# Altium PCB Copy of pwr_V1.1.PcbDoc (part 1 of 2)
Units mil, origin at the board's own origin, x right, y up, seen from the top; angles counter-clockwise.
Board outline 5925.54 x 5925.54 mil, 4 copper layers (Top Layer, GND, VCC, Bottom Layer); 133 components, 126 nets, 409 pads, 2275 vias.
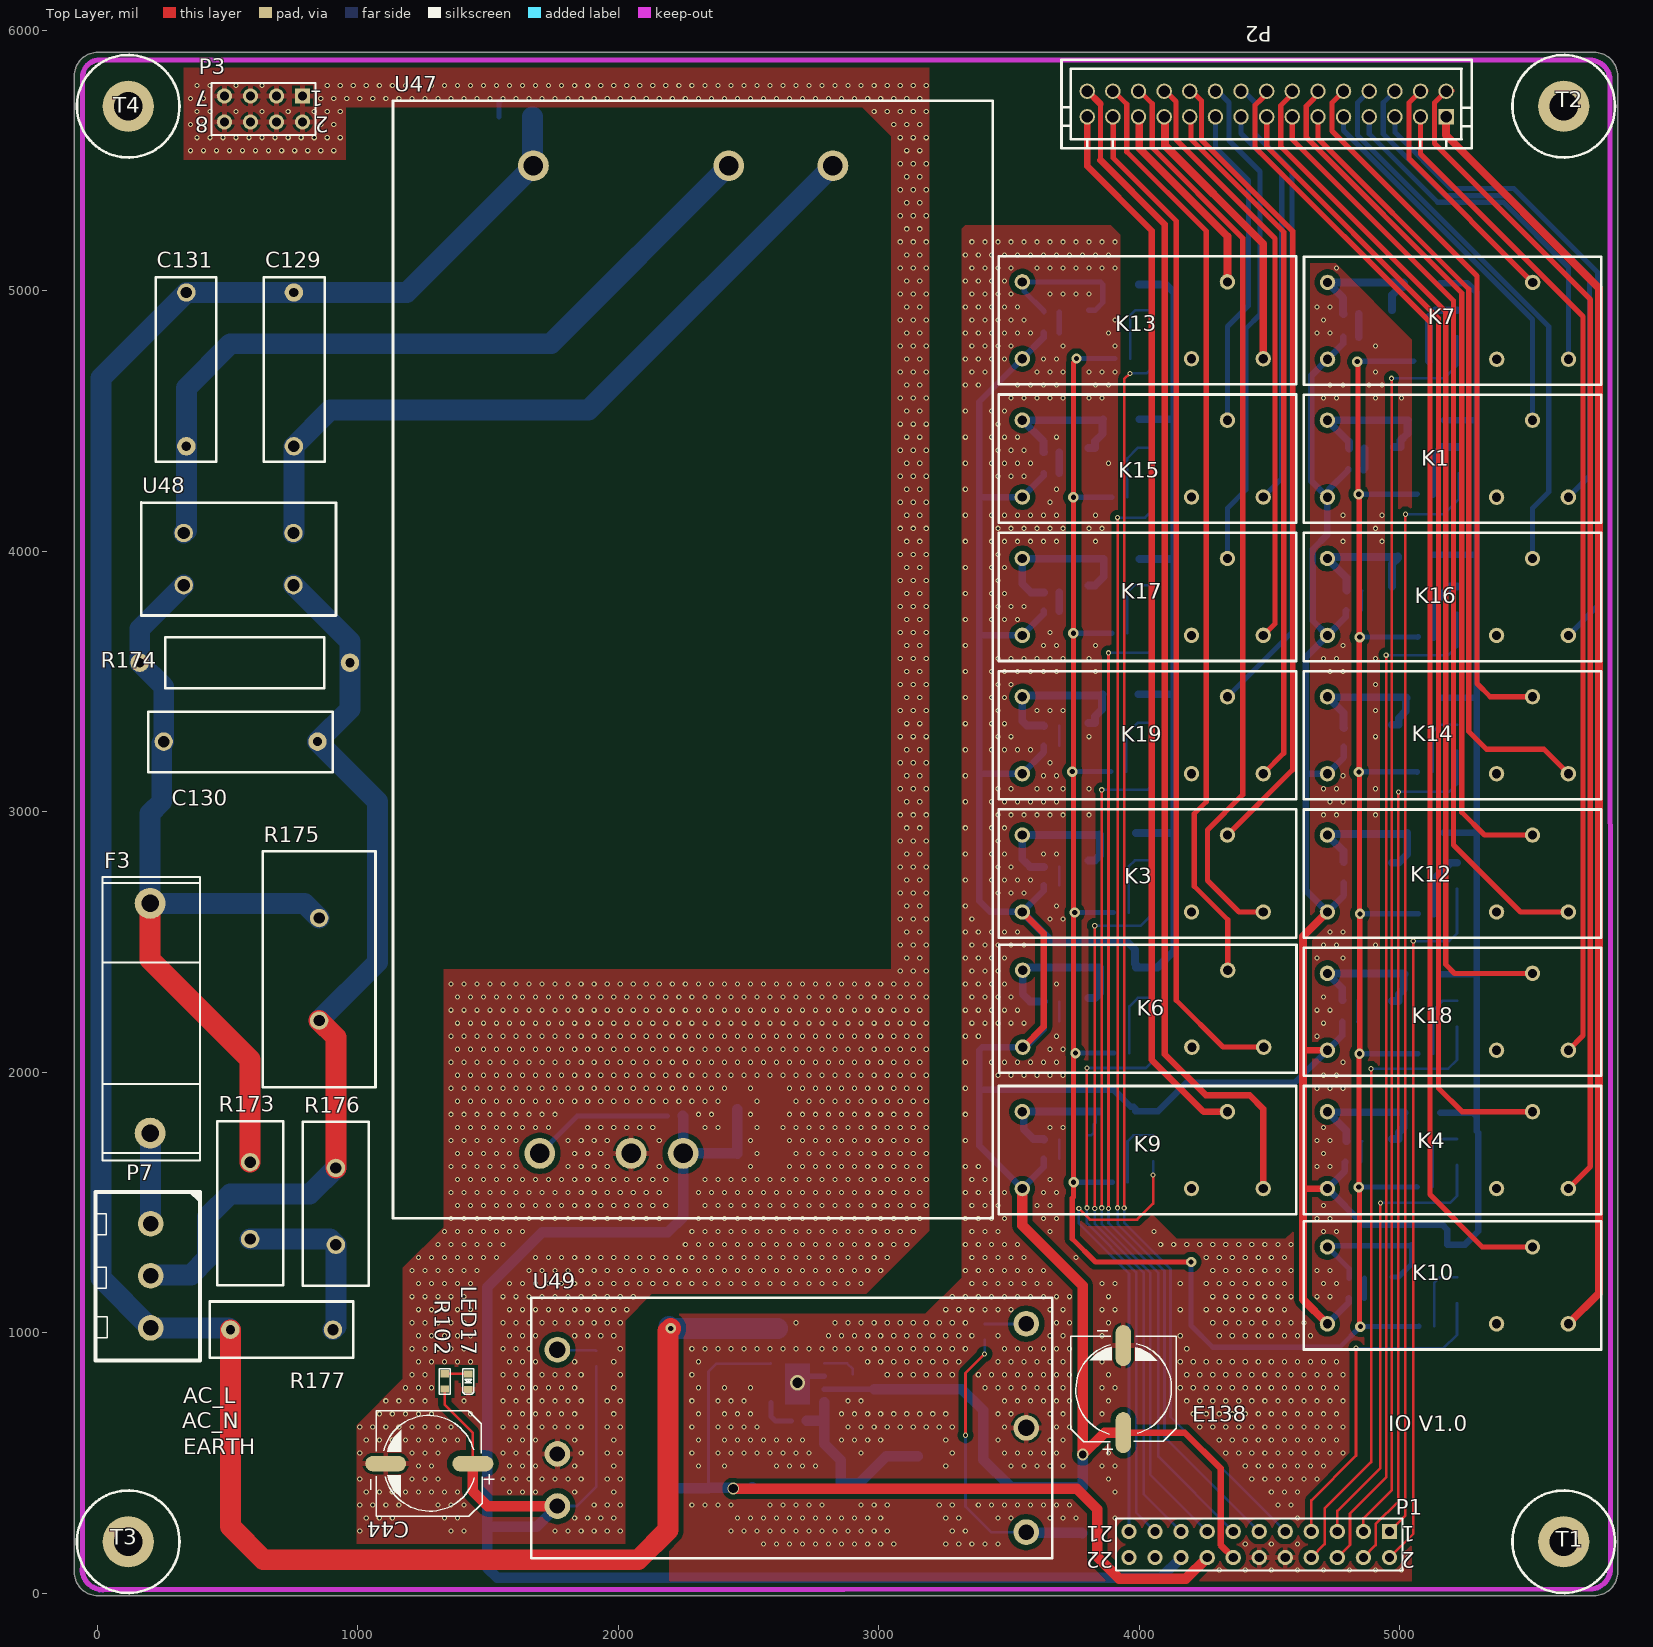
[diagram p0: Top Layer view]
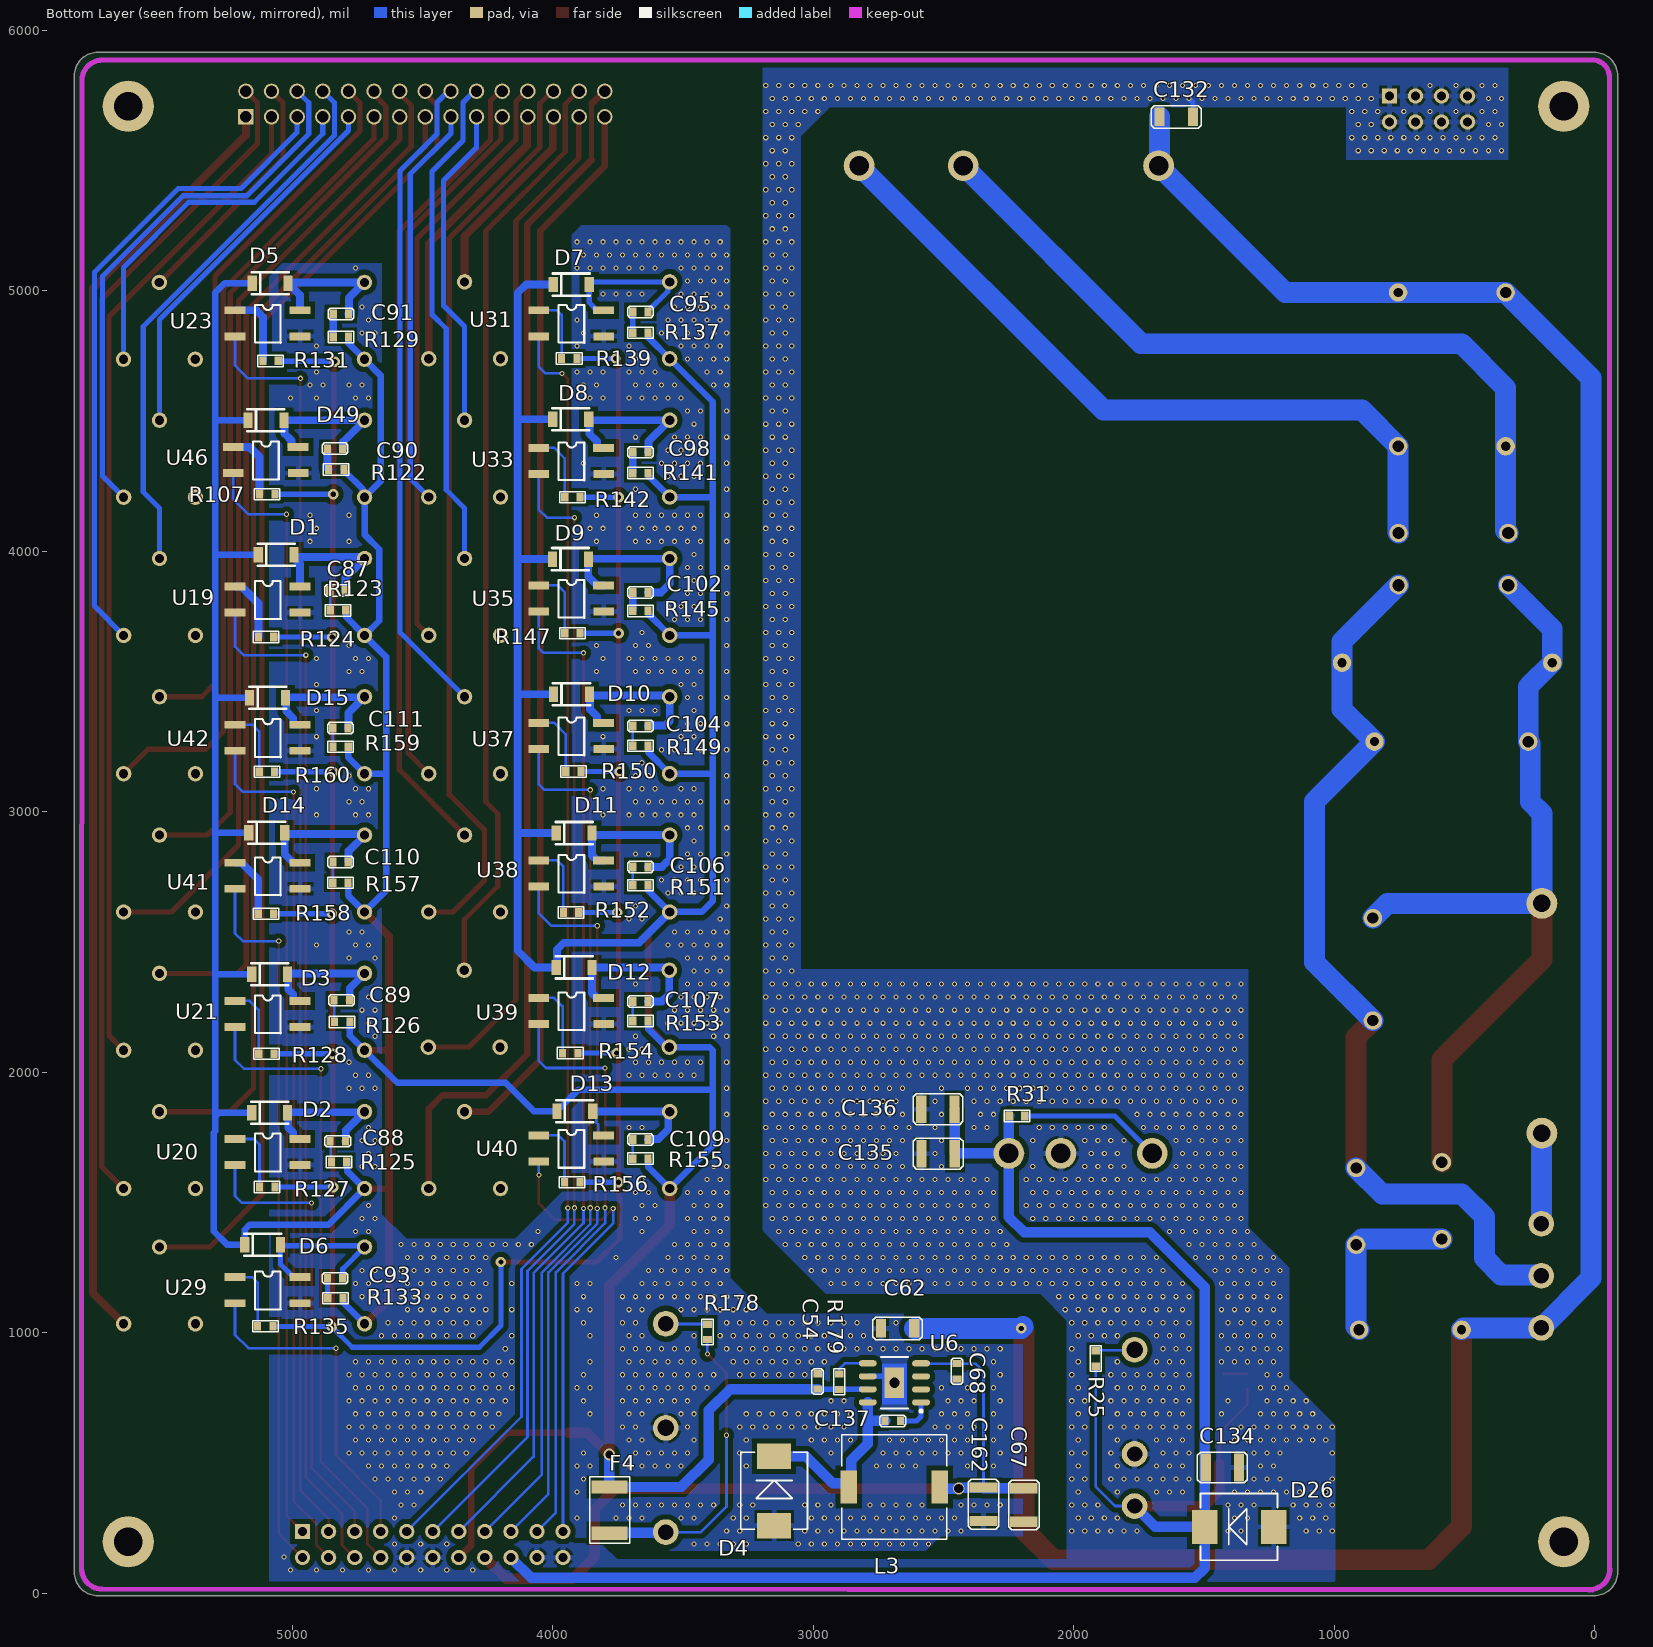
[diagram p1: Bottom Layer view, seen from below]

## Layer stack, top to bottom
Top Solder: solder mask 0.4, Solder Resist, Dk 3.5
Top Layer: signal copper 1.4
Dielectric1: core 12.6, FR-4, Dk 4.8
GND: signal copper 1.4
Dielectric2: prepreg 12.6, FR-4, Dk 4.8
VCC: signal copper 1.4
Dielectric3: core 12.6, FR-4, Dk 4.8
Bottom Layer: signal copper 1.4
Bottom Solder: solder mask 0.4, Solder Resist, Dk 3.5

## Board outline
0,-10.01 cw(c0,78.74) -88.76,78.74 -88.75,5826.67 -88.76,5826.77 cw(c0,5826.77) 0,5915.53 5748.03,5915.53 cw(c5748.03,5826.77) 5836.79,5826.77 5836.79,78.74 cw(c5748.03,78.74) 5748.03,-10.01

## Design rules (kind name [scope] priority, off if disabled: settings)
Clearance [InPolygon] p1: gap=20 ignorepadtopadclearanceinfootprint=FALSE
Clearance Clearance_1 [All] p2: gap=5 ignorepadtopadclearanceinfootprint=FALSE
HoleToHoleClearance [All] p1: gap=5 allowstackedmicrovias=TRUE
MinimumSolderMaskSliver [All] p1: minsoldermaskwidth=5
PolygonConnect PolygonConnect_1 [IsVia] p1: connectstyle=Direct reliefconductorwidth=10 reliefentries=4 polygonreliefangle="90 Angle" airgapwidth=10
PolygonConnect [All] p2: connectstyle=Relief reliefconductorwidth=20 reliefentries=4 polygonreliefangle="90 Angle" airgapwidth=10
RoutingVias [All] p1: holewidth=10 width=20 viastyle="Through Hole" minholewidth=10 minwidth=20 maxholewidth=100 maxwidth=200
SilkToSilkClearance [All] p1: silktosilkclearance=5
SilkToSolderMaskClearance SilkscreenOverComponentPads [IsPad] p1: minsilkscreentomaskgap=0 clearancetoexposedcopper=TRUE
SolderMaskExpansion [All] p1: expansion=4 istentingtop=FALSE
Width [All] p1: maxlimit=200 minlimit=10 preferedwidth=10
26 further rules are at their usual default settings.

## Classes and differential pairs
net class N000-1_[0..19]: N000-1_0 N000-1_1 N000-1_2 N000-1_3 N000-1_4 N000-1_5 N000-1_6 N000-1_7 N000-1_8 N000-1_9 N000-1_10 N000-1_11 N000-1_12 N000-1_13 N000-1_14 N000-1_15 N000-1_16 N000-1_17 N000-1_18 N000-1_19
net class DO_O[0..19]: DO_O0 DO_O1 DO_O2 DO_O3 DO_O4 DO_O5 DO_O6 DO_O7 DO_O8 DO_O9 DO_O10 DO_O11 DO_O12 DO_O13 DO_O14 DO_O15 DO_O16 DO_O17 DO_O18 DO_O19
net class DO[0..19]: DO0 DO1 DO2 DO3 DO4 DO5 DO6 DO7 DO8 DO9 DO10 DO11 DO12 DO13 DO14 DO15 DO16 DO17 DO18 DO19
net class DI[0..11]: DI0 DI1 DI2 DI3 DI4 DI5 DI6 DI7 DI8 DI9 DI10 DI11
component class relay: K1 K3 K4 K6 K7 K9 K10 K12 K13 K14 K15 K16 K17 K18 K19 P2
component class power: C44 C54 C62 C67 C68 C129 C130 C131 C132 C134 C135 C136 C137 C162 D4 D26 E138 F3 F4 L3 LED17 P7 R25 R31 R102 R173 R174 R175 R176 R177 R178 R179 T1 T2 T3 T4 U6 U47 U48 U49
component class do: C87 C88 C89 C90 C91 C93 C95 C98 C102 C104 C106 C107 C109 C110 C111 D1 D2 D3 D5 D6 D7 D8 D9 D10 D11 D12 D13 D14 D15 D49 F1 P1 P3 R107 R122 R123 R124 R125 R126 R127 R128 R129 R131 R133 R135 R137 R139 R141 R142 R145 R147 R149 R150 R151 R152 R153 R154 R155 R156 R157 R158 R159 R160 U19 U20 U21 U23 U29 U31 U33 U35 U37 U38 U39 U40 U41 U42 U46

## Components (designator, comment, footprint, x,y, rotation, side; value= is the part's Value field where it differs from the comment)
C44 "220uF/50V" Φ10×10 1274,497 r270 top
C54 "1uF" 0603C 2983,842 r270 bottom
C62 "1nF/2kV" 1206C 2739.95,1016 r180 bottom
C67 "22uF/10V" 1210C 2191,401.95 r270 bottom
C68 "0.1uF" 0603C 2448,881.06 r270 bottom
C87 "0.1uF" 0603C 4796.94,3849 r0 bottom
C88 "0.1uF" 0603C 4796,1735 r0 bottom
C89 "0.1uF" 0603C 4780.94,2276 r0 bottom
C90 "0.1uF" 0603C 4806,4394 r0 bottom
C91 "0.1uF" 0603C 4783.94,4911 r0 bottom
C93 "0.1uF" 0603C 4805.94,1208.82 r0 bottom
C95 "0.1uF" 0603C 3633.94,4919 r0 bottom
C98 "0.1uF" 0603C 3633.94,4380 r0 bottom
C102 "0.1uF" 0603C 3633.94,3842 r0 bottom
C104 "0.1uF" 0603C 3633.94,3329 r0 bottom
C106 "0.1uF" 0603C 3633.94,2788 r0 bottom
C107 "0.1uF" 0603C 3633.94,2271 r0 bottom
C109 "0.1uF" 0603C 3633.94,1741 r0 bottom
C110 "0.1uF" 0603C 4784.94,2807 r0 bottom
C111 "0.1uF" 0603C 4785.94,3321 r0 bottom
C129 "2.2nF/400VAC" 15x18 754,4993.55 r270 top value=22nF
C130 "0.15μF/300VAC" 15x18 844.81,3269 r180 top value=22nF
C131 "2.2nF/400VAC" 15x18 341.26,4403 r90 top value=22nF
C132 "1nF/2KV" 1206C 1542.05,5668 r0 bottom value=22nF
C134 "1uF/50V" 1210C 1365,482 r0 bottom value=22nF
C135 "4.7uF/50V" 1210C 2583.95,1687 r180 bottom value=22nF
C136 "10uF/50V" 1210C 2585,1858 r180 bottom value=22nF
C137 "0.01uF" 0603C 2724,661 r180 bottom
C162 "22uF/10V" 1210C 2346,404.95 r270 bottom
D1 "LL4148" DO-213AB/LL34/MiniMELF 5062.1,3986 r180 bottom
D2 "LL4148" DO-213AB/LL34/MiniMELF 5087.1,1844 r180 bottom
D3 "LL4148" DO-213AB/LL34/MiniMELF 5087,2376 r180 bottom
D4 "SS54" SMC 3150,259 r90 bottom
D5 "LL4148" DO-213AB/LL34/MiniMELF 5085,5029 r180 bottom
D6 "LL4148" DO-213AB/LL34/MiniMELF 5114,1337.82 r180 bottom
D7 "LL4148" DO-213AB/LL34/MiniMELF 3929,5024 r180 bottom
D8 "LL4148" DO-213AB/LL34/MiniMELF 3931,4507 r180 bottom
D9 "LL4148" DO-213AB/LL34/MiniMELF 3932,3970 r180 bottom
D10 "LL4148" DO-213AB/LL34/MiniMELF 3928,3451 r180 bottom
D11 "LL4148" DO-213AB/LL34/MiniMELF 3918,2918 r180 bottom
D12 "LL4148" DO-213AB/LL34/MiniMELF 3918,2402 r180 bottom
D13 "LL4148" DO-213AB/LL34/MiniMELF 3915,1850 r180 bottom
D14 "LL4148" DO-213AB/LL34/MiniMELF 5098,2919 r180 bottom
D15 "LL4148" DO-213AB/LL34/MiniMELF 5095,3437 r180 bottom
D26 "SMCJ30CA" SMC 1231.25,254 r0 bottom
D49 "LL4148" DO-213AB/LL34/MiniMELF 5101,4503 r180 bottom
E138 "100uF/50V" Φ10×10 3939,783 r180 top value=100pF
F3 "6.3A/250V" 可视开关电源保险丝座 202,1766 r90 top
F4 "2A" 1812-F 3782,230 r90 bottom
K1 "G2RL-1-H" G2RL-1-H 4722.39,4503.05 r0 top
K3 "G2RL-1-H" G2RL-1-H 3551,2910.28 r0 top
K4 "G2RL-1-H" G2RL-1-H 4722.39,1848.28 r0 top
K6 "G2RL-1-H" G2RL-1-H 3552.39,2391.28 r0 top
K7 "G2RL-1-H" G2RL-1-H 4723,5032.28 r0 top
K9 "G2RL-1-H" G2RL-1-H 3551,1848.28 r0 top
K10 "G2RL-1-H" G2RL-1-H 4722.39,1328.82 r0 top
K12 "G2RL-1-H" G2RL-1-H 4722.39,2910.18 r0 top
K13 "G2RL-1-H" G2RL-1-H 3551,5034.28 r0 top
K14 "G2RL-1-H" G2RL-1-H 4722.39,3441.14 r0 top
K15 "G2RL-1-H" G2RL-1-H 3551,4503.28 r0 top
K16 "G2RL-1-H" G2RL-1-H 4722.39,3972.09 r0 top
K17 "G2RL-1-H" G2RL-1-H 3551,3972.28 r0 top
K18 "G2RL-1-H" G2RL-1-H 4722.39,2379.23 r0 top
K19 "G2RL-1-H" G2RL-1-H 3551,3441.28 r0 top
L3 "CDRH105NP-100NC" CDRH105 2889.59,206.21 r90 bottom
LED17 "5V" 0603LED 1424,841.06 r270 top
P1 "XHD2.54mm 2*15" HDR2X11 4960.63,236.22 r180 top locked
P2 "Header 15X2" CONN-TH_30P-P2.50_KH-A2557-2X15A 4489.23,5717.21 r0 top
P3 "Header 4X2" HDR2X4 787.4,5748.03 r180 top locked
P7 "Header 3" KF128V-3P 204.26,1418 r270 top
R25 "NC" 0603R 1915,871 r90 bottom value=100K
R31 "NC" 0603r 2188,1832 r0 bottom value=100K
R102 "5.1K" 0603R 1333,842.06 r270 top
R107 "510" 0603R 5126,4219 r180 bottom
R122 "51K" 0603R 4861.06,4314 r180 bottom
R123 "51K" 0603R 4854,3773 r180 bottom
R124 "510" 0603R 5130,3671 r180 bottom
R125 "51K" 0603R 4850,1655 r180 bottom
R126 "51K" 0603R 4838,2193 r180 bottom
R127 "510" 0603R 5126.06,1559 r180 bottom
R128 "510" 0603R 5129.06,2071 r180 bottom
R129 "51K" 0603R 4843.06,4823 r180 bottom
R131 "510" 0603R 5113,4731 r180 bottom
R133 "51K" 0603R 4864.06,1131.82 r180 bottom
R135 "510" 0603R 5133.06,1024 r180 bottom
R137 "51K" 0603R 3693,4839 r180 bottom
R139 "510" 0603R 3966.06,4740 r180 bottom
R141 "51K" 0603R 3693,4300 r180 bottom
R142 "510" 0603R 3954.06,4207 r180 bottom
R145 "51K" 0603R 3693,3771 r180 bottom
R147 "510" 0603R 3954,3685 r180 bottom
R149 "51K" 0603R 3693,3253 r180 bottom
R150 "510" 0603R 3950.06,3154 r180 bottom
R151 "51K" 0603R 3693,2718 r180 bottom
R152 "510" 0603R 3959,2613 r180 bottom
R153 "51K" 0603R 3693,2196 r180 bottom
R154 "510" 0603R 3962.06,2073 r180 bottom
R155 "51K" 0603R 3693,1668 r180 bottom
R156 "510" 0603R 3955,1577 r180 bottom
R157 "51K" 0603R 4845,2727 r180 bottom
R158 "510" 0603R 5131,2608 r180 bottom
R159 "51K" 0603R 4844,3249 r180 bottom
R160 "510" 0603R 5127,3153 r180 bottom
R173 "14D561K" 14D561K 586.26,1359 r90 top
R174 "1MΩ/2W" 5x15.5 162.26,3572 r0 top value=100K
R175 "20D471K" 20D471K 851,2198 r90 top
R176 "14D561K" 14D561K 915.26,1632.28 r270 top
R177 "B5G3600" B5G3600 510.26,1011 r0 top
R178 "NC" 0603r 3406,1032.06 r270 bottom value=100K
R179 "100K" 0603R 2900,841 r270 bottom
T1 "TP" M2.5 5629.92,196.85 r0 top
T2 "TP" M2.5 5629.92,5708.66 r0 top
T3 "TP" M2.5 118.11,196.85 r0 top
T4 "TP" M2.5 118.11,5708.66 r0 top
U6 "LM22676MRE-5.0/NOPB" SOP127P600X168_HS-8N 2688,807 r0 bottom
U19 "AQY210S" sop4 5220,3864.43 r180 bottom
U20 "AQY210S" sop4 5220,1743.29 r180 bottom
U21 "AQY210S" sop4 5220,2273.57 r180 bottom
U23 "AQY210S" sop4 5220,4925 r180 bottom
U29 "AQY210S" sop4 5220,1213 r180 bottom
U31 "AQY210S" sop4 4054,4925 r180 bottom
U33 "AQY210S" sop4 4054,4397 r180 bottom
U35 "AQY210S" sop4 4054,3869 r180 bottom
U37 "AQY210S" sop4 4054,3341 r180 bottom
U38 "AQY210S" sop4 4054,2813 r180 bottom
U39 "AQY210S" sop4 4054,2285 r180 bottom
U40 "AQY210S" sop4 4054,1757 r180 bottom
U41 "AQY210S" sop4 5220,2803.86 r180 bottom
U42 "AQY210S" sop4 5220,3334.14 r180 bottom
U46 "AQY210S" sop4 5227,4400 r180 bottom
U47 "LHE60-20B24" LHE60-20B24 2823.85,5480.13 r270 top
U48 "FL2D-30-222" TY-100P 752.52,3870 r180 top
U49 "URB24_LD-50WR3G" URB24_LD-50WR3G 1666,634 r0 top

## Footprints (in the part's own frame and the unit in brackets; to place one, negate y for a bottom-side part, rotate by r counter-clockwise, add the part's x,y. Pads: shape width x height; smd on the part's side, far side on the other; paste and mask are expansions set on the pad)
5x15.5 [mm]
  round 1.8 hole 0.9: 1(0,0) 2(20.5,0)
  silkscreen extent 2.5,-2.5 18,2.5
14D561K [mm]
  round 1.8 hole 1.1: 1(0,0) 2(7.5,0)
  silkscreen extent -4.5,-3.21 11.5,3.21
15x18 [mm]
  round 1.8 hole 0.9: 1(0,0)
  round 1.8 hole 1.1: 2(15,0)
  silkscreen extent -1.5,-2.92 16.5,3
20D471K [mm]
  round 1.8 hole 1.1: 1(0,0) 2(10,0)
  silkscreen extent -6.5,-5.5 16.5,5.5
0603C [mm]
  rect 0.7x0.85 smd: 1(0,0) 2(1.5,0)
  silkscreen extent -0.5,-0.55 2,0.55
0603LED [mm]
  rect 0.7x0.85 smd: 1(0,0) 2(1.5,0)
  silkscreen extent -0.5,-0.55 2,0.55
0603R [mm]
  rect 0.7x0.85 smd: 1(0,0) 2(1.5,0)
  silkscreen extent -0.5,-0.55 2,0.55
0603r [mm]
  rect 0.7x0.85 smd: 1(0,0) 2(1.5,0)
  silkscreen extent -0.5,-0.55 2,0.55
1206C [mm]
  rect 1x1.8 smd: 1(0,0) 2(3.25,0)
  silkscreen extent -0.8,-1.1 4.05,1.1
1210C [mm]
  rect 1x2.7 smd: 1(0,0) 2(3.25,0)
  silkscreen extent -0.8,-1.5 4.05,1.5
1812-F [mm]
  rect 1.3x3.5 smd: 1(0,0) 2(4.5,0)
  silkscreen extent -1,-1.95 5.5,1.95
B5G3600 [mm]
  round 1.8 hole 0.9: 1(0,0)
  round 1.8 hole 1.1: 2(10,0)
  silkscreen extent -2,-2.75 12,2.75
CDRH105 [mm]
  rect 3.2x1.6 smd: 1(5.1,-0.65) 2(5.1,-9.55)
  silkscreen extent 0,-10.2 10.2,0
CONN-TH_30P-P2.50_KH-A2557-2X15A [mm]
  rect 1.5x1.5 hole 1.1 paste-2539.97 mask+0.05: 1(17.5,-1.25)
  round 1.5 hole 1.1 paste-2539.97 mask+0.05: 2(17.5,1.25) 3(15,-1.25) 4(15,1.25) 5(12.5,-1.25) 6(12.5,1.25) 7(10,-1.25) 8(10,1.25) 9(7.5,-1.25) 10(7.5,1.25) 11(5,-1.25) 12(5,1.25) 13(2.5,-1.25) 14(2.5,1.25) 15(0,-1.25) 16(0,1.25) 17(-2.5,-1.25) 18(-2.5,1.25) 19(-5,-1.25) 20(-5,1.25) 21(-7.5,-1.25) 22(-7.5,1.25) 23(-10,-1.25) 24(-10,1.25) 25(-12.5,-1.25) 26(-12.5,1.25) 27(-15,-1.25) 28(-15,1.25) 29(-17.5,-1.25) 30(-17.5,1.25)
  silkscreen extent -20.01,-4.3 20.01,4.3
DO-213AB/LL34/MiniMELF [mm]
  rect 0.9x1.5 smd: 1(1.75,0) 2(-1.75,0)
  silkscreen extent -1.8,-1.08 1.8,1.08
G2RL-1-H [mm]
  round 1.5 hole 0.9: 1(20,0) 2(16.5,-7.5) 3(23.5,-7.5) 4(0,-7.5) 5(0,0)
  silkscreen extent -2.3,-10 26.7,2.5
HDR2X4 [mm] "Connector; Header; 4x2 Position"
  rect 1.5x1.5 hole 0.9: 1(0,0)
  round 1.5 hole 0.9: 2(0,2.54) 3(2.54,0) 4(2.54,2.54) 5(5.08,0) 6(5.08,2.54) 7(7.62,0) 8(7.62,2.54)
  silkscreen extent -1.27,-1.27 8.89,3.81
HDR2X11 [mm] "Connector; Header; 11x2 Position"
  rect 1.5x1.5 hole 0.9: 1(0,0)
  round 1.5 hole 0.9: 2(0,2.54) 3(2.54,0) 4(2.54,2.54) 5(5.08,0) 6(5.08,2.54) 7(7.62,0) 8(7.62,2.54) 9(10.16,0) 10(10.16,2.54) 11(12.7,0) 12(12.7,2.54) 13(15.24,0) 14(15.24,2.54) 15(17.78,0) 16(17.78,2.54) 17(20.32,0) 18(20.32,2.54) 19(22.86,0) 20(22.86,2.54) 21(25.4,0) 22(25.4,2.54)
  silkscreen extent -1.27,-1.27 26.67,3.81
KF128V-3P [mm]
  round 2.5 hole 1.5: 1(0,0) 2(5.08,0) 3(10.16,0)
  silkscreen extent -3.1,-5.4 13.33,4.8
LHE60-20B24 [mm]
  round 3 hole 1.9: 1(0,0) 2(0,-10.16) 3(0,-29.21) 4(96.32,-28.59) 5(96.32,-19.69) 6(96.32,-14.61)
  silkscreen extent -6.34,-42.9 102.66,15.6
M2.5 [mm]
  round 5 hole 2.8 unplated: 1(0,0)
  silkscreen extent -5,-5 5,5
SMC [mm]
  rect 2.5x3.3 smd: 1(0,0) 2(6.75,0)
  silkscreen extent -0.35,-3.25 7.15,3.25
sop4 [mil]
  rect 80x30 smd: 1(0,0) 2(0,-100) 3(250,-100) 4(249,0)
  silkscreen extent 76,-125 176,21
SOP127P600X168_HS-8N [mm] "SOP, 8-Leads, Body 5.0x4.0mm (max), Pitch 1.27mm, IPC Medium Density"
  oval 1.75x0.6 smd: 1(-2.6,1.905) 2(-2.6,0.635) 3(-2.6,-0.635) 4(-2.6,-1.905) 5(2.6,-1.905) 6(2.6,-0.635) 7(2.6,0.635) 8(2.6,1.905)
  rect 1.9x3 smd: 9(0,0)
  silkscreen extent -2.72,-2.5 1.33,2.88, body extent -2,-2.5 2,2.5, height 1.68
TY-100P [mm]
  round 1.8 hole 1.2: 1(0,0) 2(10.7,0) 3(10.7,-5.08) 4(0,-5.08)
  silkscreen extent -4.15,-8.08 14.86,2.96
URB24_LD-50WR3G [mm]
  round 2.5 hole 1.6: 1(2.54,7.62) 5(48.26,0)
  round 2.5 hole 1.5: 2(2.54,-2.54) 3(2.54,-7.62) 4(48.26,-10.16) 6(48.26,10.16)
  silkscreen extent 0,-12.7 50.8,12.7
Φ10×10 [mm]
  oval 1.524x4 smd: 1(0,4.25) 2(0,-4.25)
  silkscreen extent -5.15,-5.71 5.15,6.35
可视开关电源保险丝座 [mm]
  round 3 hole 1.7: 1(0,0) 2(22.4,0)
  silkscreen extent -2.69,-4.86 24.98,4.64

## Part data
C44 E138: library part "Cap Pol1", "Polarized Capacitor (Radial)", LatestRevisionDate=17-Jul-2002, LatestRevisionNote="Re-released for DXP Platform.", PackageReference=RB7.6-15, Published=8-Jun-2000, Publisher="Altium Limited"
C54 C62 C67 C68 C87 C88 C89 C90 C91 C93 C95 C98 C102 C104 C106 C107 C109 C110 C111 C137 C162: library part CAP, "Capacitor"
C129 C130 C131 C132 C134 C135 C136: library part Cap, "Capacitor", LatestRevisionDate=17-Jul-2002, LatestRevisionNote="Re-released for DXP Platform.", PackageDescription="Radial Cap, Thru-Hole; 2 Leads; 0.3 in Pin Spacing", PackageReference=RAD-0.3, Published=8-Jun-2000, Publisher="Altium Limited"
D1 D2 D3 D5 D6 D7 D8 D9 D10 D11 D12 D13 D14 D15 D49: "VISHAY,LL4148,圆柱体MiniMELF100V/2A,ROHS", 制造商=VISHAY, 名称=快速开关二极管, 版本=V1.00, 物料编号=APLLY
D4 D26: library part "DIODE S", "Schottky Diode"
F3 F4: library part "Fuse 1", "Fuse", LatestRevisionDate=17-Jul-2002, LatestRevisionNote="Re-released for DXP Platform.", PackageDescription="Thru-Hole; 2 Leads", PackageReference=PIN-W2/E2.8, Published=8-Jun-2000, Publisher="Altium Limited"
K1 K3 K4 K6 K7 K9 K10 K12 K13 K14 K15 K16 K17 K18 K19: library part Relay-SPDT, "Single-Pole Dual-Throw Relay", LatestRevisionDate=17-Jul-2002, LatestRevisionNote="Re-released for DXP Platform.", PackageReference=MODULE5B, Published=24-Mar-1999, Publisher="Altium Limited"
L3: library part INDUCTOR
LED17: library part LED
P1: library part "Header 11X2", "Header, 11-Pin, Dual row", LatestRevisionDate=17-Jul-2002, LatestRevisionNote="Re-released for DXP Platform.", Publisher="Altium Limited"
P2: "Header, 15-Pin, Dual row", LatestRevisionDate=17-Jul-2002, LatestRevisionNote="Re-released for DXP Platform.", Publisher="Altium Limited"
P3: "Header, 4-Pin, Dual row", LatestRevisionDate=17-Jul-2002, LatestRevisionNote="Re-released for DXP Platform.", Publisher="Altium Limited"
P7: "Header, 3-Pin", LatestRevisionDate=17-Jul-2002, LatestRevisionNote="Re-released for DXP Platform.", Publisher="Altium Limited"
R25 R31 R174 R178: library part RES0603, ID=233, 制造商=三星/YAGEO, 参数值=1.00E+04, 器件等级=——, 工作温度="–55°C to 155°C", 序号=109, 物料主编码(PN)=150000040, 物料名称=贴片电阻, 物料描述=RES,贴片电阻,0603,10k,±1%,1/10W,1.6X0.8X0.45mm,RC1608F103CS/RC0603FR-0710KL, 物料类型=表贴电阻, 精度=±1%, 规格型号(完整型号)=RC1608F103CS/RC0603FR-0710KL
R102: library part R, "R"
R107 R124 R127 R128 R131 R135 R139 R142 R147 R150 R152 R154 R156 R158 R160: library part RES2
R122 R123 R125 R126 R129 R133 R137 R141 R145 R149 R151 R153 R155 R157 R159: library part Res0805M
R173 R175 R176 R177: library part "Res Varistor", "Varistor (Voltage-Sensitive Resistor)", Code_IPC=RESC2012, LatestRevisionDate=29-May-2009, LatestRevisionNote="IPC-7351 Footprint Added.", PackageDescription="Chip Resistor 0805 Case Size", PackageReference=6-0805, PackageVersion=Mar-2003, Published=24-Mar-1999, Publisher="Altium Limited"
R179: library part Res1, "Resistor", LatestRevisionDate=17-Jul-2002, LatestRevisionNote="Re-released for DXP Platform.", PackageReference=AXIAL-0.3, Published=8-Jun-2000, Publisher="Altium Limited"
U6: library part LM22676MR-5.0
U19 U20 U21 U23 U29 U31 U33 U35 U37 U38 U39 U40 U41 U42 U46: library part Optoisolator1, "4-Pin Phototransistor Optocoupler", DatasheetVersion=Nov-2003, LatestRevisionDate=04-Mar-2005, LatestRevisionNote="Sch pins 3 & 4 Swapped.", PackageReference=DIP-4, Published=24-Mar-1999, Publisher="Altium Limited"
U48: library part TY-100P, "PCB mounting filters"

## Via types
v1: diameter 20, hole 12, Top Layer to Bottom Layer, tented both sides, 2255 vias
v2: diameter 40, hole 20, Top Layer to Bottom Layer, tented both sides, 17 vias
v3: diameter 45, hole 35, Top Layer to Bottom Layer, tented both sides, 1 vias
v4: diameter 45, hole 30, Top Layer to Bottom Layer, tented both sides, 1 vias
v5: diameter 59.06, hole 39.37, Top Layer to Bottom Layer, 1 vias

## Nets (pads, with @x,y where several pads share a name; then routed paths per layer and width w, separated by ;. In a path a pad name is that pad's centre, name@x,y a point inside that pad or via, vN(x,y) a via of type N, cw(c..) or ccw(c..) an arc to the next point about the centre after c; other vN are vias at no path point)
3.3V_ISO: R107.2 R124.2 R127.2 R128.2 R131.2 R135.2 R139.2 R142.2 R147.2 R150.2 R152.2 R154.2 R156.2 R158.2 R160.2 | length 11400.2
  Top Layer w20: v2(3759.06,4740) 3759.06,4734.59 3748,4723.53 v2(3748,1577) 3748,1521.12 3743,1516.12 3743,1360 3832,1271 v2(4199,1271) ; v2(4837,4728) 4839.72,4725.28 4839.72,4221.22 v2(4842.44,4218.5) 4844.44,4216.5 4844.44,3672.5 v2(4846.44,3670.5) 4844.94,3669 4844.94,3154 v2(4843.44,3152.5) 4845.44,3150.5 4845.44,2609.5 v2(4847.44,2607.5) 4846.47,2606.53 4846.47,2071.47 v2(4845.5,2070.5) 4844,2069 4844,1560 v2(4842.5,1558.5) 4845.75,1555.25 4845.75,1026.25 v2(4849,1023)
  Bottom Layer w20: v2(3743.06,3154) R150.2@3891,3154 ; v2(3747,3685) R147.2@3894.94,3685 ; v2(3747.06,4207) R142.2@3895,4207 ; v2(3748,1577) R156.2@3895.94,1577 ; v2(3752,2613) R152.2@3899.94,2613 ; v2(3755.06,2073) R154.2@3903,2073 ; v2(3759.06,4740) R139.2@3907,4740 ; v2(4199,1271) 4199,1027 4282,944 4770,944 v2(4849,1023) 4849.5,1023.5 5073.5,1023.5 R135.2@5074,1024 ; v2(4837,4728) 4838.5,4729.5 5052.44,4729.5 R131.2@5053.94,4731 ; v2(4842.44,4218.5) 4842.94,4219 R107.2@5066.94,4219 R107.2@5067.44,4219.5 ; v2(4842.5,1558.5) 4843,1559 R127.2@5067,1559 ; v2(4843.44,3152.5) 4843.94,3153 R160.2@5067.94,3153 ; v2(4845.5,2070.5) 4846,2071 R128.2@5070,2071 ; v2(4846.44,3670.5) 4846.94,3671 R124.2@5070.94,3671 ; v2(4847.44,2607.5) 4847.94,2608 R158.2@5071.94,2608 ; R127.2@5065,1561 R127.2@5067,1559 ; R160.2@5065.94,3151 R160.2@5067.94,3153 ; R127.2@5067.5,1559.5 R127.2@5067,1559 ; R160.2@5068.44,3153.5 R160.2@5067.94,3153 ; R124.2@5068.44,3668.5 R124.2@5070.94,3671 ; R128.2@5069.5,2071.5 R128.2@5070,2071 ; R128.2@5070.5,2071.5 R128.2@5070,2071 ; R158.2@5070.94,2607 R158.2@5071.94,2608 ; R124.2@5071.44,3671.5 R124.2@5070.94,3671 ; R158.2@5072.44,2608.5 R158.2@5071.94,2608
24V_F: C54.2 D1.2 D2.2 D3.2 D5.2 D6.2 D7.2 D8.2 D9.2 D10.2 D11.2 D12.2 D13.2 D14.2 D15.2 D49.2 E138.1 F4.2 K1.4 K3.4 K4.4 K6.4 K7.4 K9.4 K10.4 K12.4 K13.4 K14.4 K15.4 K16.4 K17.4 K18.4 K19.4 P1.14 R122.2 R123.2 R125.2 R126.2 R129.2 R133.2 R137.2 R141.2 R145.2 R149.2 R151.2 R153.2 R155.2 R157.2 R159.2 R179.2 U6.7 | length 24668.8
  Top Layer w25: K3.4@3551,2615 3632.67,2533.33 3632.67,2174.35 3554.32,2096 K6.4@3552.39,2096 ; E138.1@3939,615.68 4175,615.68 4312,478.68 4312,184.85 P1.14@4360.63,136.22 ; 4629,1555 4631,1553 K4.4@4722.39,1553 ; 4629,2080 4632.95,2083.95 K18.4@4722.39,2083.95
  Top Layer w30: K10.4@4722.39,1033.55 4629,1126.94 4629,1555 4629,2080 4629,2521.51 K12.4@4722.39,2614.91
  Top Layer w40: K9.4@3551,1553 3551,1412 3783,1180 v4(3783,532) 3866.68,615.68 E138.1@3939,615.68
  Bottom Layer w20: U6.7@2790.36,782 2790.83,782.47 2982.53,782.47 C54.2@2983,782.94
  Bottom Layer w25: K6.4@3552.39,2096 3398,2096 3386,2084 3386,1933 ; K6.4@3557.7,2090.7 3632.67,2165.67 3632.67,2194.72 R153.2@3633.94,2196 ; R155.2@3633.94,1668 3632.67,1666.72 3632.67,1634.67 K9.4@3551,1553 3386,1718 3386,1933 ; R151.2@3633.94,2718 3632.67,2716.72 3632.67,2696.67 K3.4@3551,2615 3428,2615 3386,2657 3386,3150 ; R149.2@3633.94,3253 3632.67,3251.72 3632.67,3227.67 K19.4@3551,3146 3390,3146 3386,3150 ; R145.2@3633.94,3771 3632.67,3769.72 3632.67,3758.67 K17.4@3551,3677 3388,3677 3386,3679 ; R141.2@3633.94,4300 3632.67,4298.72 3632.67,4289.67 K15.4@3551,4208 3393,4208 3386,4201 ; R137.2@3633.94,4839 3632.67,4837.72 3632.67,4820.67 K13.4@3551,4739 3386,4574 3386,4201 ; K10.4@4722.39,1033.55 4803.72,1114.87 4803.72,1130.54 R133.2@4805,1131.82 ; R126.2@4778.94,2193 4778.94,2140.51 K18.4@4722.39,2083.95 4597.44,1959 4181,1959 4072,1850 D13.2@3983.9,1850 3983.9,1861.81 3978.68,1867.03 3966.87,1867.03 3900.9,1933 3386,1933 ; R129.2@4784,4823 4782.72,4821.72 4782.72,4796.72 K7.4@4723,4737 4661,4675 4661,4269.16 K1.4@4722.39,4207.77 ; R159.2@4784.94,3249 4784.94,3208.41 K14.4@4722.39,3145.86 4640,3145.86 ; R157.2@4785.94,2727 4785.94,2678.46 K12.4@4722.39,2614.91 4640,2697.3 4640,3145.86 ; R125.2@4790.94,1655 4789.67,1653.72 4789.67,1620.27 K4.4@4722.39,1553 4861.39,1414 5164,1414 5182.9,1395.1 D6.2@5182.9,1337.82 5250.82,1337.82 5302,1389 5302,1767 5295.81,1773.19 5295.81,1829 ; R123.2@4794.94,3773 4793.67,3771.72 4793.67,3748.09 K16.4@4722.39,3676.82 ; R122.2@4802,4314 4802,4311.05 4728.91,4237.96 4728.91,4214.29 K1.4@4722.39,4207.77 ; D1.2@5131,3986 5289.81,3986 5295.81,3980 ; D5.2@5153.9,5029 5260,5029 5295.81,4993.19 5295.81,4508 ; D3.2@5155.9,2376 5292.58,2376 5295.81,2379.23 ; D2.2@5156,1844 5280.81,1844 5295.81,1829 ; D15.2@5163.9,3437 5289.81,3437 5295.81,3431 ; D14.2@5166.9,2919 5291.81,2919 5295.81,2915 ; D49.2@5169.9,4503 5290.81,4503 5295.81,4508 ; 3386,3150 3386,3679 ; 3386,3679 3386,4201 ; 4640,3145.86 4640,3594.42 K16.4@4722.39,3676.82 ; K16.4@4722.39,3676.82 4666,3733.21 4666,4007.58 4722.39,4063.97 K1.4@4722.39,4207.77 ; 5295.81,1829 5295.81,2379.23 ; 5295.81,2379.23 5295.81,2915 ; 5295.81,2915 5295.81,3431 ; 5295.81,3431 5295.81,3980 ; 5295.81,3980 5295.81,4508
  Bottom Layer w30: K3.4@3551,2615 3669,2497 3957.43,2497 3984.18,2470.25 3984.18,2416.53 3986.9,2413.81 D12.2@3986.9,2402 4070,2402 4134,2466 4134,2927 ; D11.2@3986.9,2918 4125,2918 4134,2927 ; D10.2@3996.9,3451 4128,3451 4134,3445 ; D7.2@3997.9,5024 4102,5024 4134,4992 4134,4505 ; D8.2@3999.9,4507 4132,4507 4134,4505 ; D9.2@4000.9,3970 4127,3970 4134,3977 ; 4134,2927 4134,3445 ; 4134,3445 4134,3977 ; 4134,3977 4134,4505
  Bottom Layer w40: C54.2@2983,782.94 3319.06,782.94 3400.97,701.03 3400.97,512.03 3505.83,407.17 F4.2@3782,407.17 3783,408.17 v4(3783,532)
24V_IN: C44.1 C134.2 C135.2 C136.2 D26.2 P1.18 R25.1 R31.2 R102.2 U47.6 U49.3 | length 7151.2
  Top Layer w10: R102.2@1333,783 1333,723 1441.32,614.68 C44.1@1441.32,497
  Top Layer w40: C44.1@1441.32,497 1441.32,391.68 1499,334 U49.3@1766,334
  Bottom Layer w10: U49.3@1766,334 1841,334 1915,408 R25.1@1915,871
  Bottom Layer w40: U49.3@1766,334 1686,254 D26.2@1497,254 ; R31.2@2247.06,1832 2248.65,1830.4 U47.6@2248.65,1688 ; C135.2@2456,1687 C135.2@2456,1687.69 ; C136.2@2457.05,1858 2456.73,1857.69 2456.73,1800.88 2456,1800.15 C135.2@2456,1687.69 ; P1.18@4160.63,136.22 4082.41,58 1535,58 1497,96 D26.2@1497,254 ; D26.2@1497,254 1497,1175 1707,1385 2190,1385 2248.65,1443.65 U47.6@2248.65,1688 ; U47.6@2248.65,1688 2455.69,1688 C135.2@2456,1687.69
AC_L: C131.1 U47.2 U48.3 | length 2997.3
  Bottom Layer w80: U48.3@331.26,4070 341.26,4080 C131.1@341.26,4403 341.26,4627.26 511,4797 1740.72,4797 U47.2@2423.85,5480.13
AC_N: C129.2 U47.1 U48.4 | length 2849.6
  Bottom Layer w80: U48.4@752.52,4070 754,4071.48 C129.2@754,4403 893,4542 1885.72,4542 U47.1@2823.85,5480.13
DO_0: C90.1 D49.1 K1.5 U46.4 | length 593.4
  Bottom Layer w30: C90.1@4806,4394 4804.78,4395.22 4804.78,4420.66 4722.42,4503.02 D49.1@5032.1,4503 ; U46.4@4978,4400 5003,4400 5003,4425 5029.39,4451.39 5029.39,4500.28 D49.1@5032.1,4503
DO_1: C88.1 D2.1 K4.5 U20.4 | length 573.2
  Bottom Layer w30: K4.5@4722.39,1848.28 K4.5@4724.53,1846.14 ; C88.1@4796,1735 4794.78,1736.22 4794.78,1775.89 K4.5@4724.53,1846.14 ; U20.4@4971,1743.29 4996,1743.29 4996,1768.29 5015.49,1787.77 5015.49,1841.28 D2.1@5018.2,1844 5016.07,1846.14 K4.5@4724.53,1846.14
DO_2: C91.1 D5.1 K7.5 U23.4 | length 570.9
  Bottom Layer w30: C91.1@4783.94,4911 4782.72,4912.22 4782.72,4972.55 K7.5@4723,5032.28 5013.39,5032.28 5016.1,5029.56 D5.1@5016.1,5029 5016.1,5017.19 5013.39,5014.47 5001.57,5014.47 4971,4983.9 U23.4@4971,4925
DO_3: C93.1 D6.1 K10.5 U29.4 | length 651.2
  Bottom Layer w20: C93.1@4805.94,1208.82 4805.94,1245.27 K10.5@4722.39,1328.82 4726.89,1333.32 5040.6,1333.32 D6.1@5045.1,1337.82 5045.1,1262.1 4996,1213 U29.4@4971,1213
DO_4: C95.1 D7.1 K13.5 U31.4 | length 587.5
  Bottom Layer w20: C95.1@3633.94,4919 3633.94,4921.95 3558.47,4997.42 3558.47,5026.8 K13.5@3551,5034.28 D7.1@3852.39,5034.28 ; U31.4@3805,4925 3830,4925 3860.1,4955.1 D7.1@3860.1,5024
DO_5: C98.1 D8.1 K15.5 U33.4 | length 614.3
  Bottom Layer w30: C98.1@3633.94,4380 3632.72,4381.22 3632.72,4421.55 K15.5@3551,4503.28 D8.1@3859.39,4503.28 ; U33.4@3805,4397 3830,4397 3830,4422 3859.39,4451.39 D8.1@3859.39,4503.28 ; D8.1@3862.1,4507 3859.39,4504.28 D8.1@3859.39,4503.28
DO_6: C102.1 D9.1 K17.5 U35.4 | length 647.4
  Bottom Layer w30: C102.1@3633.94,3842 3584,3842 3551,3875 K17.5@3551,3972.28 3552.14,3971.14 3861.96,3971.14 D9.1@3863.1,3970 3864,3969.1 3864,3903 3830,3869 U35.4@3805,3869
DO_7: C104.1 D10.1 K19.5 U37.4 | length 638.7
  Bottom Layer w30: C104.1@3633.94,3329 3633.94,3329.51 3632.72,3330.73 3568.57,3330.73 3551,3348.31 K19.5@3551,3441.28 3555.86,3446.14 D10.1@3856.39,3446.14 ; U37.4@3805,3341 3830,3341 3830,3366 3856.39,3392.39 D10.1@3856.39,3446.14 ; D10.1@3859.1,3451 3856.39,3448.28 D10.1@3856.39,3446.14
DO_8: C106.1 D11.1 K3.5 U38.4 | length 619.8
  Bottom Layer w30: C106.1@3633.94,2788 3581,2788 3564.01,2804.99 3551,2818 K3.5@3551,2910.28 3846.39,2910.28 3849.1,2912.99 3849.1,2832.1 3830,2813 U38.4@3805,2813
DO_9: C107.1 D12.1 K6.5 U39.4 | length 636.1
  Bottom Layer w30: C107.1@3633.94,2271 3581,2271 3552.39,2299.61 K6.5@3552.39,2391.28 3560.26,2391.28 3570.98,2402 D12.1@3849.1,2402 3849.1,2304.1 3830,2285 U39.4@3805,2285
DO_10: C109.1 D13.1 K9.5 U40.4 | length 574.6
  Bottom Layer w10: U40.4@3805,1757 3815,1757 3825,1767 3825,1799 3833.39,1807.39 3833.39,1837.28 3845.24,1849.14 D13.1@3846.1,1850
  Bottom Layer w30: C109.1@3633.94,1741 3633.94,1741.51 3632.72,1742.73 3594.27,1742.73 3556.56,1780.44 3556.56,1842.72 K9.5@3551,1848.28 3551.86,1849.14 D13.1@3845.24,1849.14
DO_11: C110.1 D14.1 K12.5 U41.4 | length 592.6
  Bottom Layer w30: C110.1@4784.94,2807 4783.72,2808.22 4783.72,2848.85 K12.5@4722.39,2910.18 4726.8,2914.59 5026.39,2914.59 D14.1@5029.1,2917.31 ; U41.4@4971,2803.86 4996,2803.86 5029.1,2836.96 D14.1@5029.1,2917.31 ; D14.1@5029.1,2919 D14.1@5029.1,2917.31
DO_12: C111.1 D15.1 K14.5 U42.4 | length 589.3
  Bottom Layer w30: K14.5@4722.39,3441.14 K14.5@4724.46,3439.07 ; C111.1@4785.94,3321 4784.72,3322.22 4784.72,3378.81 K14.5@4724.46,3439.07 ; U42.4@4971,3334.14 4996,3334.14 4996,3359.14 5023.39,3386.53 5023.39,3434.28 D15.1@5026.1,3437 5024.03,3439.07 K14.5@4724.46,3439.07
DO_13: C87.1 D1.1 K16.5 U19.4 | length 553.3
  Bottom Layer w30: C87.1@4796.94,3849 4795.72,3850.22 4795.72,3898.76 K16.5@4722.39,3972.09 4727.95,3977.65 4990.49,3977.65 4993.2,3980.37 4993.2,3974.19 4971,3951.98 U19.4@4971,3864.43
DO_14: C89.1 D3.1 K18.5 U21.4 | length 561.4
  Bottom Layer w30: C89.1@4780.94,2276 4779.72,2277.22 4779.72,2321.9 K18.5@4722.39,2379.23 5015.39,2379.23 5018.1,2376.51 D3.1@5018.1,2376 5015.39,2373.28 5015.39,2317.96 4996,2298.57 4996,2273.57 U21.4@4971,2273.57
DO_CTRL_0: P1.1 U46.2 | length 4259.6
  Top Layer w10: P1.1@4960.63,236.22 5022,297.59 v1(5022,4142)
  Bottom Layer w10: v1(5022,4142) 5168,4142 5227,4201 U46.2@5227,4300
DO_CTRL_1: P1.3 U23.2 | length 4856
  Top Layer w10: P1.3@4860.63,236.22 4860.63,286.22 4969,394.59 v1(4969,4664)
  Bottom Layer w10: v1(4969,4664) 5171,4664 5220,4713 U23.2@5220,4825
DO_CTRL_2: P1.5 U20.2 | length 1753.7
  Top Layer w10: P1.5@4760.63,236.22 4760.63,315 4926,480.37 v1(4926,1498)
  Bottom Layer w10: v1(4926,1498) 5193,1498 5220,1525 U20.2@5220,1643.29
DO_CTRL_3: P1.7 U29.2 | length 1305.9
  Top Layer w10: P1.7@4660.63,236.22 4660.63,356 4832,527.37 v1(4832,940)
  Bottom Layer w10: v1(4832,940) 5169,940 5220,991 U29.2@5220,1113
DO_CTRL_4: P1.9 U31.2 | length 4929.9
  Top Layer w10: v1(3942,1478) 3942,4661 v1(3964,4683)
  Bottom Layer w10: v1(3942,1478) 3942,1422 4120,1244 4120,676.85 P1.9@4560.63,236.22 ; v1@3963,4683 v1(3964,4683) 4028,4683 4054,4709 U31.2@4054,4825
DO_CTRL_5: P1.11 U33.2 | length 4404.2
  Top Layer w10: v1(3917,1479) v1(3917,4129)
  Bottom Layer w10: v1(3917,1479) 3917,1417 4097,1237 4097,599.85 P1.11@4460.63,236.22 ; v1(3917,4129) 4022,4129 4054,4161 U33.2@4054,4297
DO_CTRL_6: P1.13 U35.2 | length 3892.5
  Top Layer w10: v1(3882,1477) v1(3882,3610)
  Bottom Layer w10: v1(3882,1477) 3882,1420 4073,1229 4073,523.85 P1.13@4360.63,236.22 ; v1(3882,3610) 4036,3610 4054,3628 U35.2@4054,3769
DO_CTRL_7: P1.15 U37.2 | length 3358.5
  Top Layer w10: v1(3856,1479) v1(3856,3084)
  Bottom Layer w10: v1@3855,3084 v1(3856,3084) 4032,3084 4054,3106 U37.2@4054,3241 ; v1(3856,1479) 3856,1416 4042,1230 4042,454.85 P1.15@4260.63,236.22
DO_CTRL_8: P1.17 U38.2 | length 2810.4
  Top Layer w10: v1(3829,1477) v1(3829,2562)
  Bottom Layer w10: v1(3829,1477) 3829,1419 4017,1231 4017,379.85 P1.17@4160.63,236.22 ; v1(3829,2562) 4005,2562 4054,2611 U38.2@4054,2713
DO_CTRL_9: P1.19 U39.2 | length 2295.2
  Top Layer w10: v1(3799,1479) v1(3799,2016)
  Bottom Layer w10: v1(3799,1479) 3799,1420 3988,1231 3988,308.85 P1.19@4060.63,236.22 ; v1(3799,2016) 4025,2016 4054,2045 U39.2@4054,2185
DO_CTRL_10: P1.21 U40.2 | length 1809.6
  Top Layer w10: v1(3768,1476) 3810,1434 3992,1434 4053,1495 v1(4053,1605)
  Bottom Layer w10: v1(3768,1476) 3768,1419.63 3960.63,1227 P1.21@3960.63,236.22 ; v1(4053,1605) 4053,1656 U40.2@4054,1657
DO_CTRL_11: P1.2 U41.2 | length 2758.4
  Top Layer w10: P1.2@4960.63,136.22 5052,227.59 v1@5052,2505
  Bottom Layer w10: v1@5051.6,2502.76 5051.85,2503 5190,2503 5220,2533 U41.2@5220,2703.86
  other v1: 5052,2503
DO_CTRL_12: P1.4 U42.2 | length 3361
  Top Layer w10: P1.4@4860.63,136.22 4908,183.59 4908,265 4995,352 v1(4995,3076)
  Bottom Layer w10: v1(4995,3076) 5190,3076 5220,3106 U42.2@5220,3234.14
DO_CTRL_13: P1.6 U19.2 | length 3959.5
  Top Layer w10: P1.6@4760.63,136.22 4809,184.59 4809,305 4948,444 v1(4948,3601)
  Bottom Layer w10: v1@4947,3601 v1(4948,3601) 5187,3601 5220,3634 U19.2@5220,3764.43
DO_CTRL_14: P1.8 U21.2 | length 2442.4
  Top Layer w10: P1.8@4660.63,136.22 4712,187.59 4712,325 4890,503 v1(4890,2013)
  Bottom Layer w10: v1(4890,2013) 5186,2013 5220,2047 U21.2@5220,2173.57
FGND: C54.1 C62.1 C67.2 C68.2 C162.2 D4.1 E138.2 P1.10 P1.12 U6.6 U6.9 U19.3 U20.3 U21.3 U23.3 U29.3 U31.3 U33.3 U35.3 U37.3 U38.3 U39.3 U40.3 U41.3 U42.3 U46.3 U49.5 | length 112.7
  Bottom Layer w20: v5(2688,807) 2713,832 U6.6@2790.36,832
  other v1: 4307.16,88 4407.16,88 4507.16,88 4607.16,88 4707.16,88 4807.16,88 4907.16,88 5007.16,88 5032.16,138 2557.16,188 2607.16,188 2657.16,188 2707.16,188 2757.16,188 2807.16,188 2857.16,188 2907.16,188 2957.16,188 3007.16,188 3057.16,188 3257.16,188 3307.16,188 3357.16,188 3407.16,188 3457.16,188 4407.16,188 4507.16,188 4607.16,188 2432.16,238 2482.16,238 2532.16,238 2582.16,238 2632.16,238 2682.16,238 2732.16,238 2782.16,238 2832.16,238 2882.16,238 2932.16,238 2982.16,238 3032.16,238 3282.16,238 3332.16,238 2457.16,288 2507.16,288 2557.16,288 2607.16,288 2657.16,288 2707.16,288 2757.16,288 2807.16,288 2857.16,288 2907.16,288 2957.16,288 3007.16,288 3257.16,288 3307.16,288 3457.16,288 3507.16,288 3657.16,288 3707.16,288 3757.16,288 3907.16,288 4607.16,288 2282.16,338 2332.16,338 2382.16,338 2432.16,338 2582.16,338 2632.16,338 2682.16,338 2732.16,338 2782.16,338 2932.16,338 2982.16,338 3032.16,338 3232.16,338 3282.16,338 3382.16,338 3432.16,338 3482.16,338 3532.16,338 3582.16,338 3632.16,338 3682.16,338 3732.16,338 4532.16,338 4582.16,338 3907.16,388 4507.16,388 4557.16,388 4607.16,388 3882.16,438 4432.16,438 4482.16,438 4532.16,438 4582.16,438 4632.16,438 4682.16,438 2307.16,488 2407.16,488 2607.16,488 2657.16,488 2707.16,488 2757.16,488 3257.16,488 3507.16,488 3557.16,488 3607.16,488 3657.16,488 3707.16,488 3857.16,488 3907.16,488 4407.16,488 4457.16,488 4507.16,488 4557.16,488 4607.16,488 4657.16,488 4707.16,488 2282.16,538 2382.16,538 2432.16,538 2482.16,538 2532.16,538 2582.16,538 2632.16,538 2682.16,538 2732.16,538 2932.16,538 3282.16,538 3482.16,538 3532.16,538 3582.16,538 3632.16,538 3682.16,538 3882.16,538 4332.16,538 4382.16,538 4432.16,538 4482.16,538 4532.16,538 4582.16,538 4632.16,538 4682.16,538 4732.16,538 4782.16,538 2307.16,588 2407.16,588 2457.16,588 2507.16,588 2557.16,588 2607.16,588 2657.16,588 2707.16,588 2857.16,588 2907.16,588 2957.16,588 3007.16,588 3257.16,588 3457.16,588 3657.16,588 3707.16,588 4307.16,588 4357.16,588 4407.16,588 4457.16,588 4507.16,588 4557.16,588 4607.16,588 4657.16,588 4707.16,588 4757.16,588 2282.16,638 2382.16,638 2432.16,638 2482.16,638 2532.16,638 2882.16,638 2932.16,638 2982.16,638 3032.16,638 3082.16,638 3132.16,638 3182.16,638 3232.16,638 3282.16,638 3482.16,638 3682.16,638 3732.16,638 4232.16,638 4282.16,638 4332.16,638 4382.16,638 4432.16,638 4482.16,638 4532.16,638 4582.16,638 4632.16,638 4682.16,638 4732.16,638 4782.16,638 2307.16,688 2407.16,688 2457.16,688 2507.16,688 2857.16,688 2907.16,688 2957.16,688 3007.16,688 3057.16,688 3107.16,688 3157.16,688 3207.16,688 3257.16,688 3457.16,688 3507.16,688 3657.16,688 3707.16,688 3857.16,688 4207.16,688 4257.16,688 4307.16,688 4357.16,688 4407.16,688 4457.16,688 4507.16,688 4557.16,688 4607.16,688 4657.16,688 4707.16,688 4757.16,688 2282.16,738 2382.16,738 2432.16,738 2482.16,738 2882.16,738 2932.16,738 3482.16,738 3532.16,738 3582.16,738 3632.16,738 3682.16,738 3732.16,738 3882.16,738 4182.16,738 4232.16,738 4282.16,738 4332.16,738 4382.16,738 4432.16,738 4482.16,738 4532.16,738 4582.16,738 4632.16,738 4682.16,738 4732.16,738 4782.16,738 2307.16,788 2407.16,788 2507.16,788 3407.16,788 3457.16,788 3507.16,788 3557.16,788 3607.16,788 3657.16,788 3707.16,788 3857.16,788 3907.16,788 4157.16,788 4207.16,788 4257.16,788 4307.16,788 4357.16,788 4407.16,788 4457.16,788 4507.16,788 4557.16,788 4607.16,788 4657.16,788 4707.16,788 4757.16,788 2282.16,838 3032.16,838 3082.16,838 3132.16,838 3182.16,838 3232.16,838 3282.16,838 3382.16,838 3432.16,838 3482.16,838 3532.16,838 3582.16,838 3632.16,838 3682.16,838 3732.16,838 3882.16,838 4182.16,838 4232.16,838 4282.16,838 4332.16,838 4382.16,838 4432.16,838 4482.16,838 4532.16,838 4582.16,838 4632.16,838 4682.16,838 4732.16,838 4782.16,838 2307.16,888 2957.16,888 3007.16,888 3057.16,888 3107.16,888 3157.16,888 3207.16,888 3257.16,888 3307.16,888 3457.16,888 3507.16,888 3557.16,888 3607.16,888 3657.16,888 3707.16,888 3857.16,888 4157.16,888 4207.16,888 4257.16,888 4307.16,888 4357.16,888 4407.16,888 4457.16,888 4507.16,888 4557.16,888 4607.16,888 4657.16,888 4707.16,888 4757.16,888 2282.16,938 2332.16,938 2382.16,938 2432.16,938 2482.16,938 2532.16,938 2582.16,938 2632.16,938 2682.16,938 2732.16,938 2782.16,938 2832.16,938 2882.16,938 2932.16,938 2982.16,938 3032.16,938 3082.16,938 3132.16,938 3182.16,938 3232.16,938 3282.16,938 3332.16,938 3482.16,938 3532.16,938 3582.16,938 3632.16,938 3682.16,938 3732.16,938 4182.16,938 2807.16,988 2857.16,988 2907.16,988 2957.16,988 3007.16,988 3057.16,988 3107.16,988 3157.16,988 3207.16,988 3257.16,988 3307.16,988 3357.16,988 3457.16,988 3657.16,988 3707.16,988 3857.16,988 4157.16,988 4307.16,988 4357.16,988 4407.16,988 4457.16,988 4507.16,988 4557.16,988 4607.16,988 4657.16,988 2682.16,1038 2832.16,1038 2882.16,1038 2932.16,1038 2982.16,1038 3032.16,1038 3082.16,1038 3132.16,1038 3182.16,1038 3232.16,1038 3282.16,1038 3332.16,1038 3682.16,1038 3732.16,1038 3882.16,1038 4282.16,1038 4332.16,1038 4382.16,1038 4432.16,1038 4482.16,1038 4532.16,1038 4582.16,1038 4632.16,1038 3257.16,1088 3307.16,1088 3357.16,1088 3407.16,1088 3457.16,1088 3507.16,1088 3657.16,1088 3707.16,1088 3857.16,1088 3907.16,1088 4157.16,1088 4257.16,1088 4307.16,1088 4357.16,1088 4407.16,1088 4457.16,1088 4507.16,1088 4557.16,1088 3282.16,1138 3332.16,1138 3382.16,1138 3432.16,1138 3482.16,1138 3532.16,1138 3582.16,1138 3632.16,1138 3682.16,1138 3732.16,1138 3882.16,1138 4282.16,1138 4332.16,1138 4382.16,1138 4432.16,1138 4482.16,1138 4532.16,1138 4582.16,1138 4682.16,1138 4732.16,1138 3357.16,1188 3407.16,1188 3457.16,1188 3507.16,1188 3557.16,1188 3607.16,1188 3657.16,1188 3857.16,1188 3907.16,1188 4157.16,1188 4257.16,1188 4307.16,1188 4357.16,1188 4407.16,1188 4457.16,1188 4507.16,1188 4557.16,1188 4707.16,1188 4757.16,1188 3332.16,1238 3382.16,1238 3432.16,1238 3482.16,1238 3532.16,1238 3582.16,1238 3632.16,1238 4282.16,1238 4332.16,1238 4382.16,1238 4432.16,1238 4482.16,1238 4532.16,1238 4582.16,1238 4682.16,1238 4732.16,1238 3357.16,1288 3407.16,1288 3457.16,1288 3507.16,1288 3557.16,1288 3757.16,1288 4257.16,1288 4307.16,1288 4357.16,1288 4407.16,1288 4457.16,1288 4507.16,1288 4557.16,1288 3332.16,1338 3382.16,1338 3432.16,1338 3482.16,1338 3532.16,1338 4082.16,1338 4132.16,1338 4182.16,1338 4232.16,1338 4282.16,1338 4332.16,1338 4382.16,1338 4432.16,1338 4482.16,1338 4532.16,1338 4582.16,1338 3357.16,1388 3407.16,1388 3457.16,1388 3657.16,1388 4057.16,1388 4707.16,1388 4757.16,1388 3332.16,1438 3382.16,1438 3432.16,1438 3482.16,1438 3632.16,1438 3682.16,1438 4682.16,1438 4732.16,1438 3357.16,1488 3407.16,1488 3457.16,1488 3607.16,1488 3657.16,1488 4707.16,1488 3332.16,1538 3382.16,1538 3432.16,1538 3482.16,1538 3632.16,1538 3682.16,1538 3357.16,1588 3407.16,1588 3657.16,1588 3332.16,1638 3382.16,1638 4682.16,1638 4732.16,1638 4707.16,1688 3332.16,1738 4682.16,1738 4732.16,1738 3657.16,1788 3707.16,1788 4707.16,1788 3332.16,1838 3332.16,1938 4682.16,1938 4732.16,1938 4782.16,1938 3457.16,1988 3507.16,1988 3557.16,1988 3607.16,1988 3657.16,1988 3707.16,1988 4707.16,1988 4757.16,1988 3332.16,2038 3432.16,2038 3482.16,2038 3532.16,2038 3582.16,2038 3632.16,2038 3682.16,2038 4782.16,2038 3657.16,2088 3707.16,2088 3332.16,2138 3382.16,2138 3682.16,2138 4682.16,2138 3357.16,2188 3407.16,2188 3457.16,2188 3507.16,2188 3557.16,2188 4707.16,2188 3332.16,2238 3382.16,2238 3432.16,2238 3482.16,2238 3532.16,2238 4682.16,2238 4732.16,2238 3357.16,2288 3407.16,2288 3457.16,2288 3507.16,2288 4707.16,2288 3332.16,2338 3382.16,2338 3432.16,2338 3482.16,2338 3682.16,2338 3357.16,2388 3407.16,2388 3457.16,2388 3332.16,2438 3382.16,2438 3432.16,2438 3482.16,2438 4682.16,2438 4782.16,2438 3357.16,2488 3407.16,2488 3457.16,2488 3507.16,2488 3557.16,2488 4707.16,2488 4757.16,2488 4907.16,2488 3332.16,2538 3382.16,2538 3432.16,2538 3482.16,2538 3532.16,2538 4732.16,2538 4782.16,2538 3357.16,2588 3657.16,2588 3707.16,2588 3332.16,2638 3682.16,2638 3457.16,2688 3507.16,2688 3557.16,2688 3332.16,2738 3432.16,2738 3482.16,2738 3532.16,2738 3582.16,2738 3457.16,2788 3507.16,2788 3332.16,2838 3432.16,2838 3482.16,2838 3632.16,2838 3682.16,2838 3457.16,2888 3332.16,2938 3432.16,2938 3482.16,2938 3457.16,2988 3507.16,2988 3557.16,2988 3607.16,2988 3657.16,2988 3707.16,2988 3807.16,2988 4707.16,2988 4757.16,2988 4907.16,2988 3332.16,3038 3432.16,3038 3482.16,3038 3532.16,3038 3582.16,3038 3632.16,3038 3682.16,3038 4732.16,3038 4782.16,3038 3457.16,3088 3507.16,3088 3607.16,3088 3657.16,3088 3707.16,3088 3807.16,3088 4707.16,3088 4757.16,3088 4907.16,3088 3332.16,3138 3632.16,3138 3682.16,3138 4782.16,3138 3657.16,3188 3332.16,3238 3432.16,3238 3482.16,3238 3532.16,3238 3582.16,3238 3457.16,3288 3507.16,3288 3807.16,3288 4907.16,3288 3332.16,3338 3432.16,3338 3482.16,3338 3457.16,3388 3607.16,3388 3657.16,3388 3707.16,3388 4907.16,3388 3332.16,3438 3432.16,3438 3482.16,3438 3457.16,3488 3507.16,3488 4907.16,3488 3332.16,3538 3432.16,3538 3482.16,3538 3532.16,3538 3582.16,3538 3632.16,3538 3682.16,3538 3832.16,3538 4732.16,3538 4782.16,3538 3457.16,3588 3507.16,3588 3557.16,3588 3607.16,3588 3657.16,3588 3707.16,3588 3807.16,3588 4707.16,3588 4757.16,3588 4907.16,3588 3332.16,3638 3632.16,3638 3682.16,3638 3832.16,3638 4782.16,3638 3657.16,3688 3332.16,3738 3432.16,3738 3482.16,3738 3532.16,3738 3457.16,3788 3507.16,3788 3557.16,3788 3332.16,3838 3432.16,3838 3482.16,3838 3457.16,3888 3332.16,3938 3432.16,3938 3482.16,3938 3457.16,3988 3332.16,4038 3432.16,4038 3482.16,4038 3532.16,4038 3582.16,4038 3632.16,4038 3682.16,4038 3832.16,4038 4782.16,4038 4932.16,4038 3457.16,4088 3507.16,4088 3557.16,4088 3607.16,4088 3657.16,4088 3707.16,4088 3807.16,4088 3857.16,4088 4907.16,4088 3332.16,4138 3432.16,4138 3482.16,4138 3532.16,4138 3582.16,4138 3632.16,4138 3682.16,4138 3832.16,4138 4782.16,4138 4932.16,4138 3657.16,4188 3332.16,4238 3682.16,4238 3457.16,4288 3507.16,4288 3557.16,4288 3332.16,4338 3432.16,4338 3482.16,4338 3532.16,4338 3582.16,4338 3882.16,4338 3457.16,4388 3507.16,4388 3557.16,4388 3332.16,4438 3432.16,4438 3482.16,4438 3532.16,4438 3682.16,4438 3457.16,4488 3332.16,4538 3432.16,4538 3482.16,4538 3507.16,4588 3557.16,4588 3607.16,4588 3657.16,4588 3707.16,4588 3807.16,4588 3857.16,4588 4707.16,4588 4757.16,4588 4907.16,4588 5007.16,4588 3332.16,4638 3382.16,4638 3532.16,4638 3582.16,4638 3632.16,4638 3682.16,4638 3832.16,4638 3882.16,4638 4732.16,4638 4782.16,4638 4882.16,4638 4932.16,4638 3357.16,4688 3407.16,4688 3607.16,4688 3657.16,4688 3707.16,4688 3807.16,4688 3857.16,4688 3907.16,4688 4907.16,4688 3332.16,4738 3382.16,4738 3432.16,4738 3482.16,4738 3632.16,4738 3682.16,4738 3357.16,4788 3407.16,4788 3457.16,4788 3507.16,4788 3707.16,4788 3907.16,4788 4907.16,4788 3332.16,4838 3382.16,4838 3432.16,4838 3482.16,4838 3532.16,4838 3582.16,4838 3882.16,4838 4682.16,4838 4732.16,4838 3357.16,4888 3407.16,4888 3457.16,4888 3507.16,4888 3557.16,4888 3907.16,4888 4707.16,4888 3332.16,4938 3382.16,4938 3432.16,4938 3482.16,4938 3532.16,4938 4682.16,4938 4732.16,4938 3357.16,4988 3407.16,4988 3457.16,4988 3507.16,4988 3657.16,4988 3707.16,4988 3757.16,4988 3807.16,4988 3332.16,5038 3382.16,5038 3432.16,5038 3482.16,5038 3357.16,5088 3407.16,5088 3457.16,5088 3507.16,5088 3607.16,5088 3657.16,5088 3707.16,5088 3757.16,5088 3807.16,5088 3857.16,5088 3907.16,5088 4757.16,5088 3332.16,5138 3382.16,5138 3432.16,5138 3482.16,5138 3532.16,5138 3582.16,5138 3632.16,5138 3682.16,5138 3732.16,5138 3782.16,5138 3832.16,5138 3882.16,5138 3357.16,5188 3407.16,5188 3457.16,5188 3507.16,5188 3557.16,5188 3607.16,5188 3657.16,5188 3707.16,5188 3757.16,5188 3807.16,5188 3857.16,5188 3907.16,5188